# EAGLE board new_board2 (EAGLE 6.4)
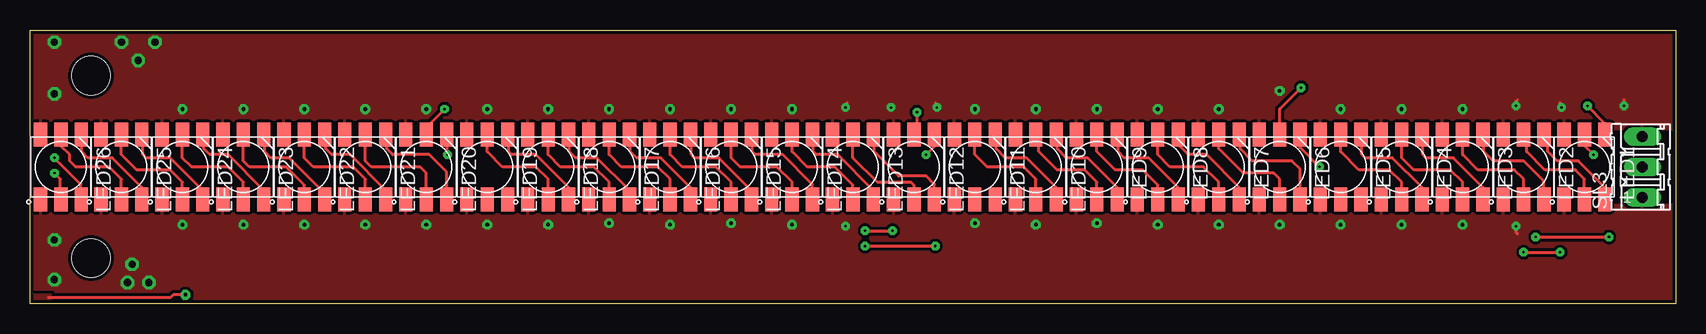
[diagram p0: board, top side]
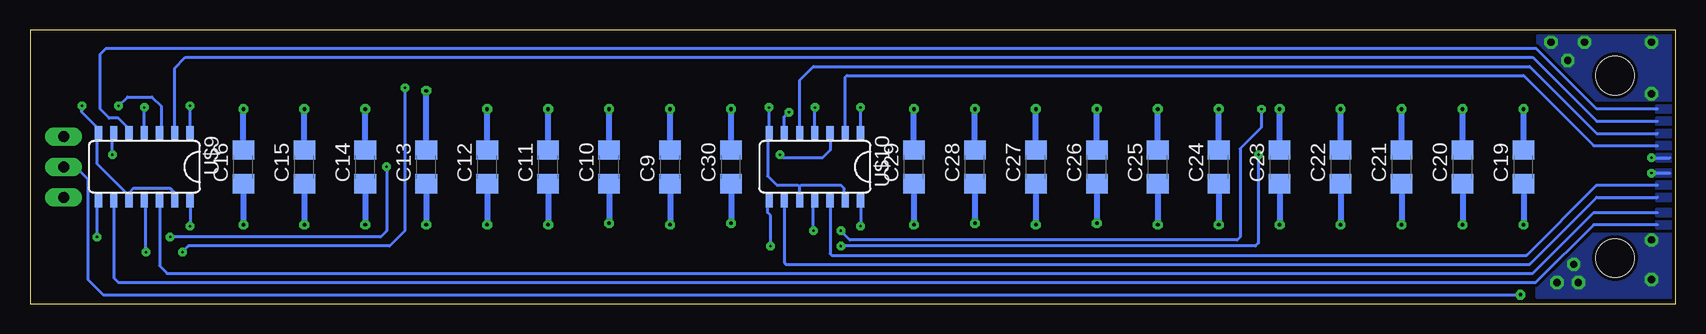
[diagram p1: board, bottom side, seen from below]

Size 137.16 x 22.86 mm. Coordinates in mm from the lower left corner, seen from the top.
Outline: 0,22.86 137.16,22.86 137.16,0 0,0 0,22.86
Copper layers (1*16): Top 0.035mm / dielectric 1.5mm / Bottom 0.035mm
Design rules "SparkFun *": minimum track width 10mil, minimum drill 0.2mm, track to track 10mil, track to pad 10mil, pad to pad 10mil, via to via 10mil, smd to smd 0mil, copper to edge 0.3mm, drill to drill 10mil, minimum pad ring 12mil, minimum via ring 10mil, stop-mask expansion 4mil, vias tented up to drill 20mil, thermal gap 10mil
Holes 3.2 mm at 5.08,19.05 5.08,3.81

## Footprints (pad centres in the part's own frame; a part is rotated, then mirrored left to right if it is on the bottom)
C1206 = smd 1.6 x 1.8: 1 -1.4,0; 2 1.4,0
APA102 = smd 2 x 1.1: CI -2.7,0; CO 2.7,0; DI -2.7,1.7; DO 2.7,1.7; GND -2.7,-1.7; VCC 2.7,-1.7
03P = drill 0.914 long: 1 -2.54,0; 2 0,0; 3 2.54,0
SO014 = smd 0.6 x 1.2: 1 -3.175,-2.8; 2 -1.905,-2.8; 3 -0.635,-2.8; 4 0.635,-2.8; 5 1.905,-2.8; 6 3.175,-2.8; 7 4.445,-2.8; 8 4.445,2.8; 9 3.175,2.8; 10 1.905,2.8; 11 0.635,2.8; 12 -0.635,2.8; 13 -1.905,2.8; 14 -3.175,2.8

## Placement (x,y rotation side)
C9  [C1206]  83.82,11.43 90 bottom
C10  [C1206]  88.9,11.43 90 bottom
C11  [C1206]  93.98,11.43 90 bottom
C12  [C1206]  99.06,11.43 90 bottom
C13  [C1206]  104.14,11.43 90 bottom
C14  [C1206]  109.22,11.43 90 bottom
C15  [C1206]  114.3,11.43 90 bottom
C16  [C1206]  119.38,11.43 90 bottom
C19  [C1206]  12.7,11.43 90 bottom
C20  [C1206]  17.78,11.43 90 bottom
C21  [C1206]  22.86,11.43 90 bottom
C22  [C1206]  27.94,11.43 90 bottom
C23  [C1206]  33.02,11.43 90 bottom
C24  [C1206]  38.1,11.43 90 bottom
C25  [C1206]  43.18,11.43 90 bottom
C26  [C1206]  48.26,11.43 90 bottom
C27  [C1206]  53.34,11.43 90 bottom
C28  [C1206]  58.42,11.43 90 bottom
C29  [C1206]  63.5,11.43 90 bottom
C30  [C1206]  78.74,11.43 90 bottom
LED1  APA102  [APA102]  129.54,11.43 270 top
LED2  APA102  [APA102]  124.46,11.43 270 top
LED3  APA102  [APA102]  119.38,11.43 270 top
LED4  APA102  [APA102]  114.3,11.43 270 top
LED5  APA102  [APA102]  109.22,11.43 270 top
LED6  APA102  [APA102]  104.14,11.43 270 top
LED7  APA102  [APA102]  99.06,11.43 270 top
LED8  APA102  [APA102]  93.98,11.43 270 top
LED9  APA102  [APA102]  88.9,11.43 270 top
LED10  APA102  [APA102]  83.82,11.43 270 top
LED11  APA102  [APA102]  78.74,11.43 270 top
LED12  APA102  [APA102]  73.66,11.43 270 top
LED13  APA102  [APA102]  68.58,11.43 270 top
LED14  APA102  [APA102]  63.5,11.43 270 top
LED15  APA102  [APA102]  58.42,11.43 270 top
LED16  APA102  [APA102]  53.34,11.43 270 top
LED17  APA102  [APA102]  48.26,11.43 270 top
LED18  APA102  [APA102]  43.18,11.43 270 top
LED19  APA102  [APA102]  38.1,11.43 270 top
LED20  APA102  [APA102]  33.02,11.43 270 top
LED21  APA102  [APA102]  27.94,11.43 270 top
LED22  APA102  [APA102]  22.86,11.43 270 top
LED23  APA102  [APA102]  17.78,11.43 270 top
LED24  APA102  [APA102]  12.7,11.43 270 top
LED25  APA102  [APA102]  7.62,11.43 270 top
LED26  APA102  [APA102]  2.58,11.43 270 top
SL3  [03P]  134.37,11.43 90 top
U$9  74HCT125D  [SO014]  127,11.43 180 bottom
U$10  74HCT125D  [SO014]  71.12,11.43 180 bottom

## Library data of the parts
C9-C16 C19-C30 = rcl
LED1-LED26 = adafruit
SL3 = con-amp-quick; OC_FARNELL: unknown; OC_NEWARK: unknown
U$9 U$10 = SparkFun-DigitalIC

## Nets
+5V/1: C9.1 C10.1 C11.1 C12.1 C13.1 C14.1 C15.1 C16.1 C19.1 C20.1 C21.1 C22.1 C23.1 C24.1 C25.1 C26.1 C27.1 C28.1 C29.1 C30.1 LED1.VCC LED2.VCC LED3.VCC LED4.VCC LED5.VCC LED6.VCC LED7.VCC LED8.VCC LED9.VCC LED10.VCC LED11.VCC LED12.VCC LED13.VCC LED14.VCC LED15.VCC LED16.VCC LED17.VCC LED18.VCC LED19.VCC LED20.VCC LED21.VCC LED22.VCC LED23.VCC LED24.VCC LED25.VCC LED26.VCC SL3.1 U$9.14 U$10.14
GA1: U$9.2
GA2: U$9.5
GA3: U$9.9
GA4: U$9.12
GA5: U$10.2
GA6: U$10.5
GA7: U$10.9
GA8: U$10.12
GND: C9.2 C10.2 C11.2 C12.2 C13.2 C14.2 C15.2 C16.2 C19.2 C20.2 C21.2 C22.2 C23.2 C24.2 C25.2 C26.2 C27.2 C28.2 C29.2 C30.2 LED1.GND LED2.GND LED3.GND LED4.GND LED5.GND LED6.GND LED7.GND LED8.GND LED9.GND LED10.GND LED11.GND LED12.GND LED13.GND LED14.GND LED15.GND LED16.GND LED17.GND LED18.GND LED19.GND LED20.GND LED21.GND LED22.GND LED23.GND LED24.GND LED25.GND LED26.GND SL3.3 U$9.1 U$9.4 U$9.7 U$9.10 U$9.13 U$10.1 U$10.4 U$10.7 U$10.10 U$10.13
N$1: SL3.2
N$46: LED2.DO LED3.DI
N$51: LED2.CO LED3.CI
N$56: LED3.DO LED4.DI
N$57: LED3.CO LED4.CI
N$58: LED4.DO LED5.DI
N$59: LED4.CO LED5.CI
N$60: LED1.DO LED2.DI
N$61: LED1.CO LED2.CI
N$66: LED7.DO LED8.DI
N$67: LED7.CO LED8.CI
N$68: LED8.DO LED9.DI
N$69: LED8.CO LED9.CI
N$70: LED9.DO LED10.DI
N$71: LED9.CO LED10.CI
N$72: LED6.DO LED7.DI
N$73: LED6.CO LED7.CI
N$75: LED10.DO LED11.DI
N$76: LED10.CO LED11.CI
N$77: LED21.DO LED22.DI
N$78: LED13.DO LED14.DI
N$80: LED13.CO LED14.CI
N$82: LED14.DO LED15.DI
N$85: LED14.CO LED15.CI
N$86: LED15.DO LED16.DI
N$87: LED15.CO LED16.CI
N$88: LED12.DO LED13.DI
N$89: LED12.CO LED13.CI
N$91: LED16.DO LED17.DI
N$92: LED16.CO LED17.CI
N$93: LED21.CO LED22.CI
N$94: LED17.DO LED18.DI
N$95: LED17.CO LED18.CI
N$96: LED22.DO LED23.DI
N$97: LED18.DO LED19.DI
N$98: LED18.CO LED19.CI
N$99: LED22.CO LED23.CI
N$100: LED23.DO LED24.DI
N$101: LED23.CO LED24.CI
N$102: LED20.DO LED21.DI
N$103: LED20.CO LED21.CI
N$105: LED24.DO LED25.DI
N$106: LED24.CO LED25.CI
N$107: LED25.DO LED26.DI
N$108: LED25.CO LED26.CI
N$109: LED26.DO
N$112: LED26.CO
N$123: LED1.DI U$9.3
N$168: LED1.CI U$9.6
N$169: LED6.DI U$9.8
N$170: LED6.CI U$9.11
N$171: LED12.DI U$10.3
N$172: LED12.CI U$10.6
N$173: LED20.DI U$10.8
N$174: LED20.CI U$10.11

## Tracks (layer width: path | path; a pad name or v marks a point on that pad's centre or on a via)
+5V/1  (via drill 0.2, 0.3, 0.6)
  Top 0.254: v123.83,6.48 123.83,5.97 123.95,5.84 | v67.94,6.48 68.07,6.35
  Bottom 0.254: U$9.14 v123.83,6.48 | U$10.14 v67.94,6.48
  Bottom 0.508: C16.1 v119.38,6.6 | C15.1 v114.3,6.6 | C14.1 v109.22,6.6 | C13.1 v104.14,6.6 | C12.1 v99.06,6.6 | C11.1 v93.98,6.6 | 88.9,10.16 C10.1 v88.9,6.73 | C9.1 v83.82,6.6 | 78.74,10.16 C30.1 v78.74,6.73 | C29.1 v63.5,6.6 | 58.42,10.16 C28.1 v58.42,6.73 | C27.1 v53.34,6.6 | 48.26,10.16 C26.1 v48.26,6.73 | C25.1 v43.18,6.6 | C24.1 v38.1,6.6 | C23.1 v33.02,6.6 | C22.1 v27.94,6.6 | C21.1 v22.86,6.6 | C20.1 v17.78,6.6 | C19.1 v12.7,6.6
  other vias: 2.03,2.03 2.03,5.33 8.13,1.78 9.91,1.78 8.51,3.3
  pour Top (rank 2): 0,8.26 137.16,8.26 137.16,0 0,0
  pour Bottom: 0.38,0.51 11.56,0.51 11.56,5.84 0.38,5.84
GA1
  Bottom 0.254: U$9.2 125.09,19.68 124.21,20.57 11.94,20.57 6.6,15.24 1.52,15.24
  pour Bottom: 0.38,15.49 1.65,15.49 1.65,14.99 0.38,14.99
GA2
  Bottom 0.254: U$9.5 128.78,14.23 128.78,14.22 128.78,14.48 129.79,15.49 130.56,15.49 131.32,16.26 131.32,20.83 130.81,21.34 11.68,21.34 6.6,16.26 1.52,16.26
  pour Bottom: 0.38,16.51 1.65,16.51 1.65,16 0.38,16
GA3
  Bottom 0.254: U$9.9 130.18,2.16 129.79,1.78 11.68,1.78 6.86,6.6 1.52,6.6
  pour Bottom: 0.38,6.86 1.65,6.86 1.65,6.35 0.38,6.35
GA4
  Bottom 0.254: U$9.12 126.36,3.17 125.73,2.54 11.94,2.54 6.86,7.62 1.52,7.62
  pour Bottom: 0.38,7.87 1.65,7.87 1.65,7.37 0.38,7.37
GA5
  Bottom 0.254: U$10.2 69.22,18.92 69.09,19.05 12.7,19.05 6.86,13.21 1.52,13.21
  pour Bottom: 0.38,13.46 1.65,13.46 1.65,12.95 0.38,12.95
GA6
  Bottom 0.254: U$10.5 73.03,18.67 71.88,19.81 12.19,19.81 6.6,14.22 1.52,14.22
  pour Bottom: 0.38,14.48 1.65,14.48 1.65,13.97 0.38,13.97
GA7
  Bottom 0.254: U$10.9 74.3,3.43 74.17,3.3 12.19,3.3 6.6,8.89 1.52,8.89
  pour Bottom: 0.38,9.14 1.65,9.14 1.65,8.64 0.38,8.64
GA8
  Bottom 0.254: U$10.12 70.48,4.19 70.36,4.06 12.45,4.06 6.6,9.91 1.52,9.91
  pour Bottom: 0.38,10.16 1.65,10.16 1.65,9.65 0.38,9.65
GND  (via drill 0.2, 0.3, 0.6)
  Top 0.254: v127.64,16.38 127.64,16.64 127.51,16.76 | v123.83,16.51 123.83,16.89 123.95,17.02 | v132.84,16.51 132.84,17.02 | v75.56,16.38 75.56,16.64 75.44,16.76 | v71.75,16.38 71.88,16.51 | v67.94,16.38 67.94,16.64 68.07,16.76
  Bottom 0.254: U$9.13 125.22,8.76 125.22,9.4 125.48,9.65 128.52,9.65 128.91,9.27 U$9.10 128.91,9.02 131.57,11.68 131.57,14.1 U$9.7 131.44,14.61 132.84,16 v132.84,16.51 | U$9.4 v127.64,16.38 | U$9.1 v123.83,16.51 | v75.56,16.38 U$10.7 75.69,14.1 75.69,10.67 74.93,9.91 73.15,9.91 73.03,9.78 | U$10.4 v71.75,16.38 | U$10.10 73.03,9.78 | 73.03,9.78 72.9,9.91 69.6,9.91 69.34,9.65 69.34,8.76 U$10.13 | U$10.1 v67.94,16.38
  Bottom 0.508: C19.2 v12.7,16.26 | C20.2 v17.78,16.26 | C21.2 v22.86,16.26 | C22.2 v27.94,16.26 | C23.2 v33.02,16.26 | C24.2 v38.1,16.26 | C25.2 v43.18,16.26 | C26.2 v48.26,16.26 | C27.2 v53.34,16.26 | C28.2 v58.42,16.26 | C29.2 v63.5,16.26 | C30.2 v78.74,16.26 | C9.2 v83.82,16.26 | C10.2 v88.9,16.26 | C11.2 v93.98,16.26 | C12.2 v99.06,16.26 | C13.2 v104.14,17.78 | C14.2 v109.22,16.26 | C15.2 v114.3,16.26 | C16.2 v119.38,16.26
  other vias: 2.03,21.84 2.03,17.53 7.62,21.84 10.41,21.84 9.02,20.32
  pour Top: 0,22.86 137.16,22.86 137.16,14.61 0,14.61
  pour Bottom: 0.38,22.35 11.56,22.35 11.56,17.02 0.38,17.02
N$1  (via drill 0.3)
  Top 0.254: v12.95,0.76 11.94,0.76 11.68,0.51 1.52,0.51
  Bottom 0.254: SL3.2 133.35,11.43 132.33,10.41 132.33,2.03 131.06,0.76 v12.95,0.76
  pour Top: 0.38,0.76 1.65,0.76 1.65,0.25 0.38,0.25
N$46
  Top 0.254: LED2.DO 126.16,10.24 124.46,11.94 121.92,11.94 121.16,12.7 121.16,14.05 LED3.DI
N$51
  Top 0.254: LED2.CO 124.46,10.41 123.7,11.18 120.65,11.18 119.38,12.45 LED3.CI
N$56
  Top 0.254: LED3.DO 121.08,9.73 118.62,12.19 116.33,12.19 116.08,12.45 116.08,14.05 LED4.DI
N$57
  Top 0.254: LED3.CO 119.38,10.16 118.36,11.18 115.32,11.18 114.3,12.19 LED4.CI
N$58
  Top 0.254: LED4.DO 116,9.73 113.54,12.19 111.25,12.19 111,12.45 111,14.05 LED5.DI
N$59
  Top 0.254: LED4.CO 114.3,10.16 113.28,11.18 110.74,11.18 109.22,12.7 LED5.CI
N$60
  Top 0.254: LED2.DI 126.49,13.8 126.49,12.7 127.25,11.94 129.03,11.94 131.24,9.73 LED1.DO
N$61
  Top 0.254: LED1.CO 129.54,10.41 128.78,11.18 126.24,11.18 124.71,12.7 124.71,13.88 LED2.CI
N$66
  Top 0.254: LED7.DO 100.76,9.73 98.04,12.45 96.52,12.45 95.76,13.21 95.76,14.05 LED8.DI
N$67
  Top 0.254: LED7.CO 99.06,10.16 97.79,11.43 95,11.43 93.98,12.45 LED8.CI
N$68
  Top 0.254: LED8.DO 95.68,9.73 93.22,12.19 91.19,12.19 90.68,12.7 90.68,14.05 LED9.DI
N$69
  Top 0.254: LED8.CO 93.98,9.91 92.71,11.18 90.42,11.18 88.9,12.7 LED9.CI
N$70
  Top 0.254: LED9.DO 90.6,9.73 88.14,12.19 86.36,12.19 85.6,12.95 85.6,14.05 LED10.DI
N$71
  Top 0.254: LED9.CO 88.9,10.16 87.88,11.18 85.6,11.18 84.07,12.7 84.07,13.88 LED10.CI
N$72
  Top 0.254: LED6.DO 105.84,11.25 105.16,11.94 101.85,11.94 100.84,12.95 100.84,14.05 LED7.DI
N$73
  Top 0.254: LED6.CO 104.14,10.41 103.63,10.92 101.09,10.92 99.06,12.95 LED7.CI
N$75
  Top 0.254: LED10.DO 85.52,9.73 83.06,12.19 81.28,12.19 80.52,12.95 80.52,14.05 LED11.DI
N$76
  Top 0.254: LED10.CO 83.82,10.41 82.8,11.43 79.76,11.43 78.74,12.45 LED11.CI
N$77
  Top 0.254: LED21.DO 29.64,9.48 26.67,12.45 25.15,12.45 24.64,12.95 24.64,14.05 LED22.DI
N$78
  Top 0.254: LED13.DO 70.28,9.48 67.31,12.45 65.53,12.45 65.28,12.7 65.28,14.05 LED14.DI
N$80
  Top 0.254: LED13.CO 68.58,9.91 67.06,11.43 64.77,11.43 63.5,12.7 LED14.CI
N$82
  Top 0.254: LED14.DO 65.2,9.98 62.74,12.45 60.45,12.45 60.2,12.7 60.2,14.05 LED15.DI
N$85
  Top 0.254: LED14.CO 63.5,10.16 62.23,11.43 59.18,11.43 58.42,12.19 LED15.CI
N$86
  Top 0.254: LED15.DO 60.12,9.48 57.4,12.19 55.37,12.19 55.12,12.45 55.12,14.05 LED16.DI
N$87
  Top 0.254: LED15.CO 58.42,10.16 57.15,11.43 54.36,11.43 53.34,12.45 LED16.CI
N$88
  Top 0.254: LED13.DI 70.36,14.05 70.36,12.7 72.39,10.67 74.68,10.67 75.36,9.98 LED12.DO
N$89
  Top 0.254: LED13.CI 68.58,12.19 70.61,10.16 73.41,10.16 73.66,9.91 LED12.CO
N$91
  Top 0.254: LED16.DO 55.04,9.73 52.58,12.19 50.55,12.19 50.04,12.7 50.04,14.05 LED17.DI
N$92
  Top 0.254: LED16.CO 53.34,10.41 52.32,11.43 49.28,11.43 48.26,12.45 LED17.CI
N$93
  Top 0.254: LED21.CO 27.94,10.41 26.92,11.43 23.62,11.43 22.86,12.19 LED22.CI
N$94
  Top 0.254: LED17.DO 49.96,9.48 47.24,12.19 45.47,12.19 44.96,12.7 44.96,14.05 LED18.DI
N$95
  Top 0.254: LED17.CO 48.26,10.16 46.99,11.43 44.2,11.43 43.18,12.45 LED18.CI
N$96
  Top 0.254: LED22.DO 24.56,9.22 21.59,12.19 20.07,12.19 19.56,12.7 19.56,14.05 LED23.DI
N$97
  Top 0.254: LED18.DO 44.88,9.73 42.16,12.45 40.13,12.45 39.88,12.7 39.88,14.05 LED19.DI
N$98
  Top 0.254: LED18.CO 43.18,10.41 42.16,11.43 39.37,11.43 38.1,12.7 LED19.CI
N$99
  Top 0.254: LED22.CO 22.86,9.91 21.34,11.43 18.29,11.43 17.78,11.94 LED23.CI
N$100
  Top 0.254: LED23.DO 19.48,9.48 16.51,12.45 14.99,12.45 14.48,12.95 14.48,14.05 LED24.DI
N$101
  Top 0.254: LED23.CO 17.78,10.16 16.51,11.43 13.46,11.43 12.7,12.19 LED24.CI
N$102
  Top 0.254: LED20.DO 34.72,11 33.27,12.45 30.23,12.45 29.72,12.95 29.72,14.05 LED21.DI
N$103
  Top 0.254: LED20.CO 33.02,10.92 32.51,11.43 28.45,11.43 27.94,11.94 LED21.CI
N$105
  Top 0.254: LED24.DO 14.4,9.48 11.68,12.19 9.65,12.19 9.4,12.45 9.4,14.05 LED25.DI
N$106
  Top 0.254: LED24.CO 12.7,10.16 11.68,11.18 8.89,11.18 7.62,12.45 LED25.CI
N$107
  Top 0.254: LED25.DO 9.32,9.73 6.86,12.19 4.83,12.19 4.32,12.7 4.32,14.05 LED26.DI
N$108
  Top 0.254: LED25.CO 7.62,10.41 6.6,11.43 3.81,11.43 3.3,11.94 3.3,12.45 2.54,13.21 LED26.CI
N$109  (via drill 0.2)
  Top 0.254: LED26.DO 4.24,9.98 v2.03,12.19
  Bottom 0.254: v2.03,12.19 0.51,12.19
  pour Bottom: 0.38,12.45 1.65,12.45 1.65,11.94 0.38,11.94
N$112  (via drill 0.2)
  Top 0.254: LED26.CO 2.54,10.41 v2.03,10.92
  Bottom 0.254: v2.03,10.92 0.51,10.92
  pour Bottom: 0.38,11.18 1.65,11.18 1.65,10.67 0.38,10.67
N$123  (via drill 0.2)
  Top 0.254: LED1.DI 131.24,15.06 v129.79,16.51
  Bottom 0.254: v129.79,16.51 129.03,17.27 127,17.27 126.24,16.51 126.24,14.36 U$9.3
N$168  (via drill 0.2)
  Top 0.254: LED1.CI 129.54,13.21 v130.3,12.45
  Bottom 0.254: v130.3,12.45 130.3,14.1 U$9.6
N$169  (via drill 0.2)
  Top 0.254: LED6.DI 105.84,13.03 v107.44,11.43 | v125.48,5.59 v131.57,5.59
  Bottom 0.254: v107.44,11.43 107.44,6.1 107.95,5.59 v125.48,5.59 | v131.57,5.59 131.57,8.5 U$9.8
N$170  (via drill 0.2)
  Top 0.254: LED6.CI 104.14,16.26 v105.92,18.03 | v124.46,4.32 v127.51,4.32
  Bottom 0.254: v105.92,18.03 105.92,6.1 107.19,4.83 123.95,4.83 v124.46,4.32 | v127.51,4.32 127.51,8.5 U$9.11
N$171  (via drill 0.2)
  Top 0.254: v74.68,12.45 75.44,13.21 75.44,14.05 LED12.DI
  Bottom 0.254: U$10.3 70.48,12.83 71.12,12.19 74.42,12.19 v74.68,12.45
N$172  (via drill 0.2)
  Top 0.254: v73.91,16 73.91,14.38 LED12.CI
  Bottom 0.254: U$10.6 74.3,15.62 v73.91,16
N$173  (via drill 0.2)
  Top 0.254: LED20.DI 34.72,12.52 v34.8,12.45 | v69.6,4.83 v75.44,4.83
  Bottom 0.254: v34.8,12.45 34.8,5.08 35.05,4.83 v69.6,4.83 | v75.44,4.83 75.44,7.37 75.69,7.62 75.69,8.5 U$10.8
N$174  (via drill 0.2)
  Top 0.254: LED20.CI 33.02,14.73 v34.54,16.26 | v69.6,6.1 v71.88,6.1
  Bottom 0.254: v34.54,16.26 34.54,14.73 36.32,12.95 36.32,5.59 36.58,5.33 68.83,5.33 v69.6,6.1 | v71.88,6.1 71.88,8.5 U$10.11